# Altium PCB garmin-gps-module-eval-board.PcbDoc
Units mm, origin at the board's own origin, x right, y up, seen from the top; angles counter-clockwise.
Board outline 36 x 51 mm, 4 copper layers (Top Layer, GND, VCC, Bottom Layer), stack 0.603 mm thick; 42 components, 39 nets, 140 pads, 168 vias.
Unrouted connection lines stored in the file: 1.
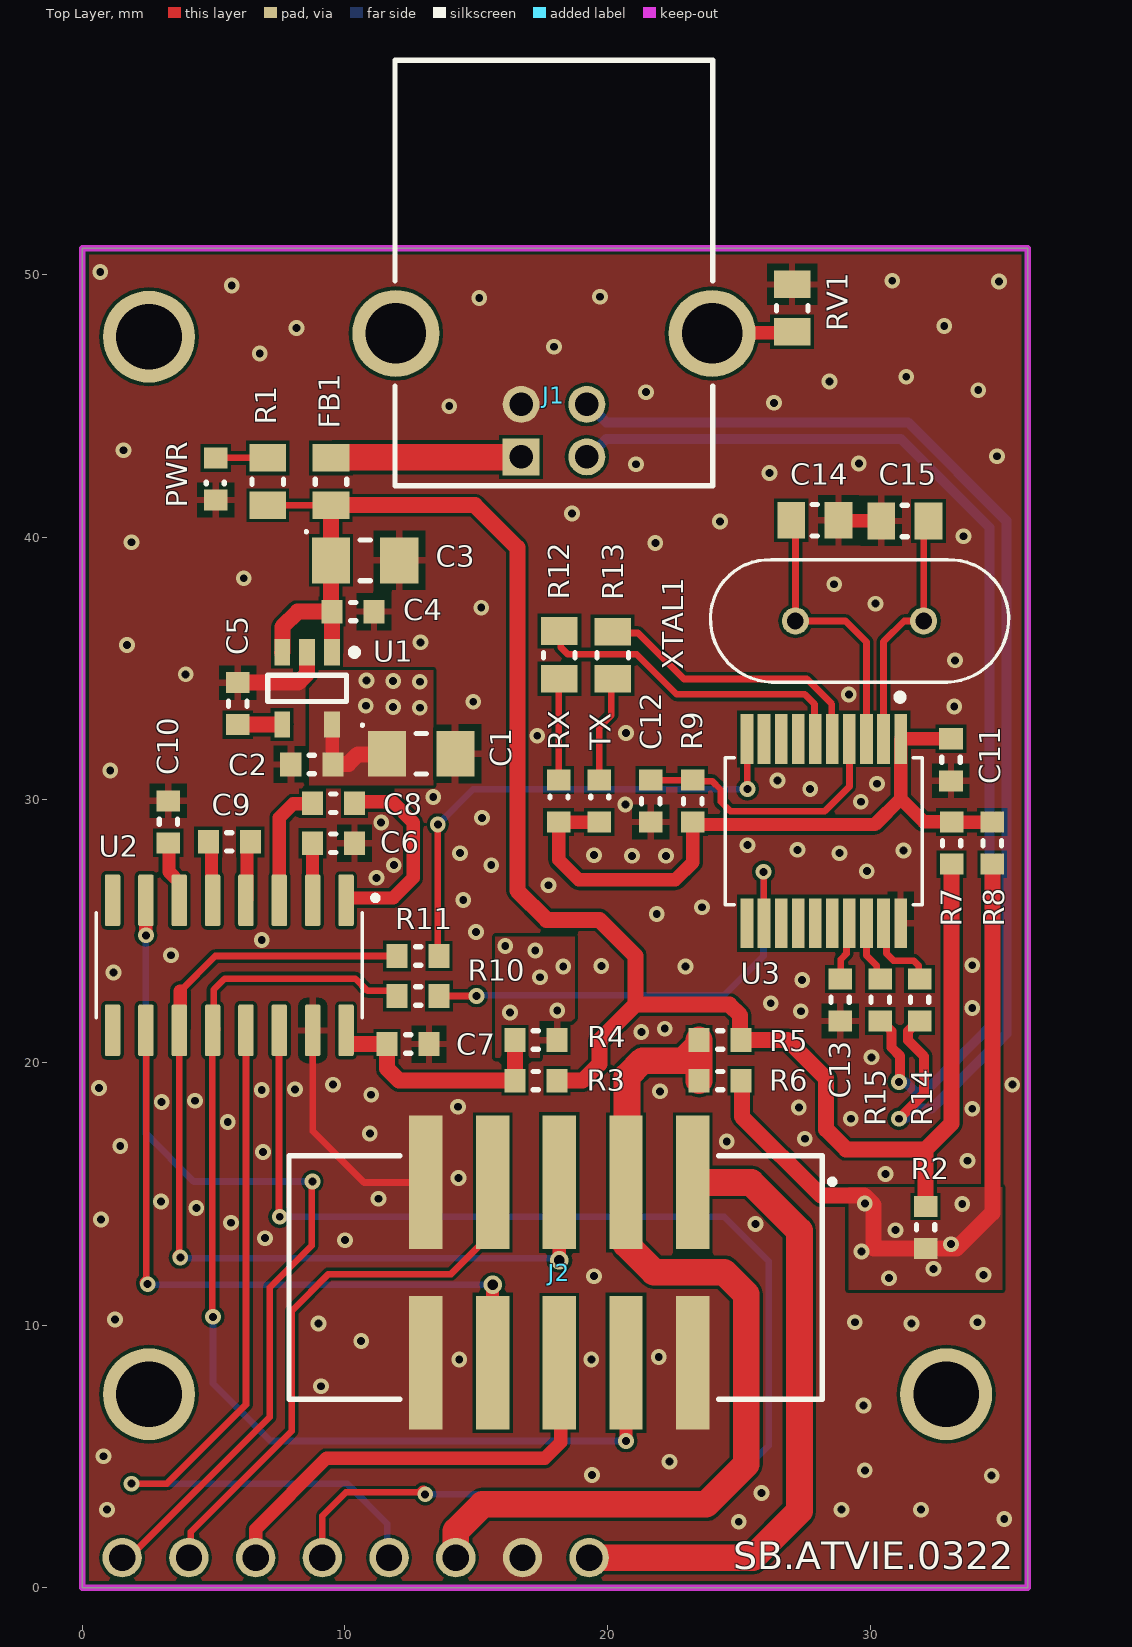
[diagram p0: Top Layer view]
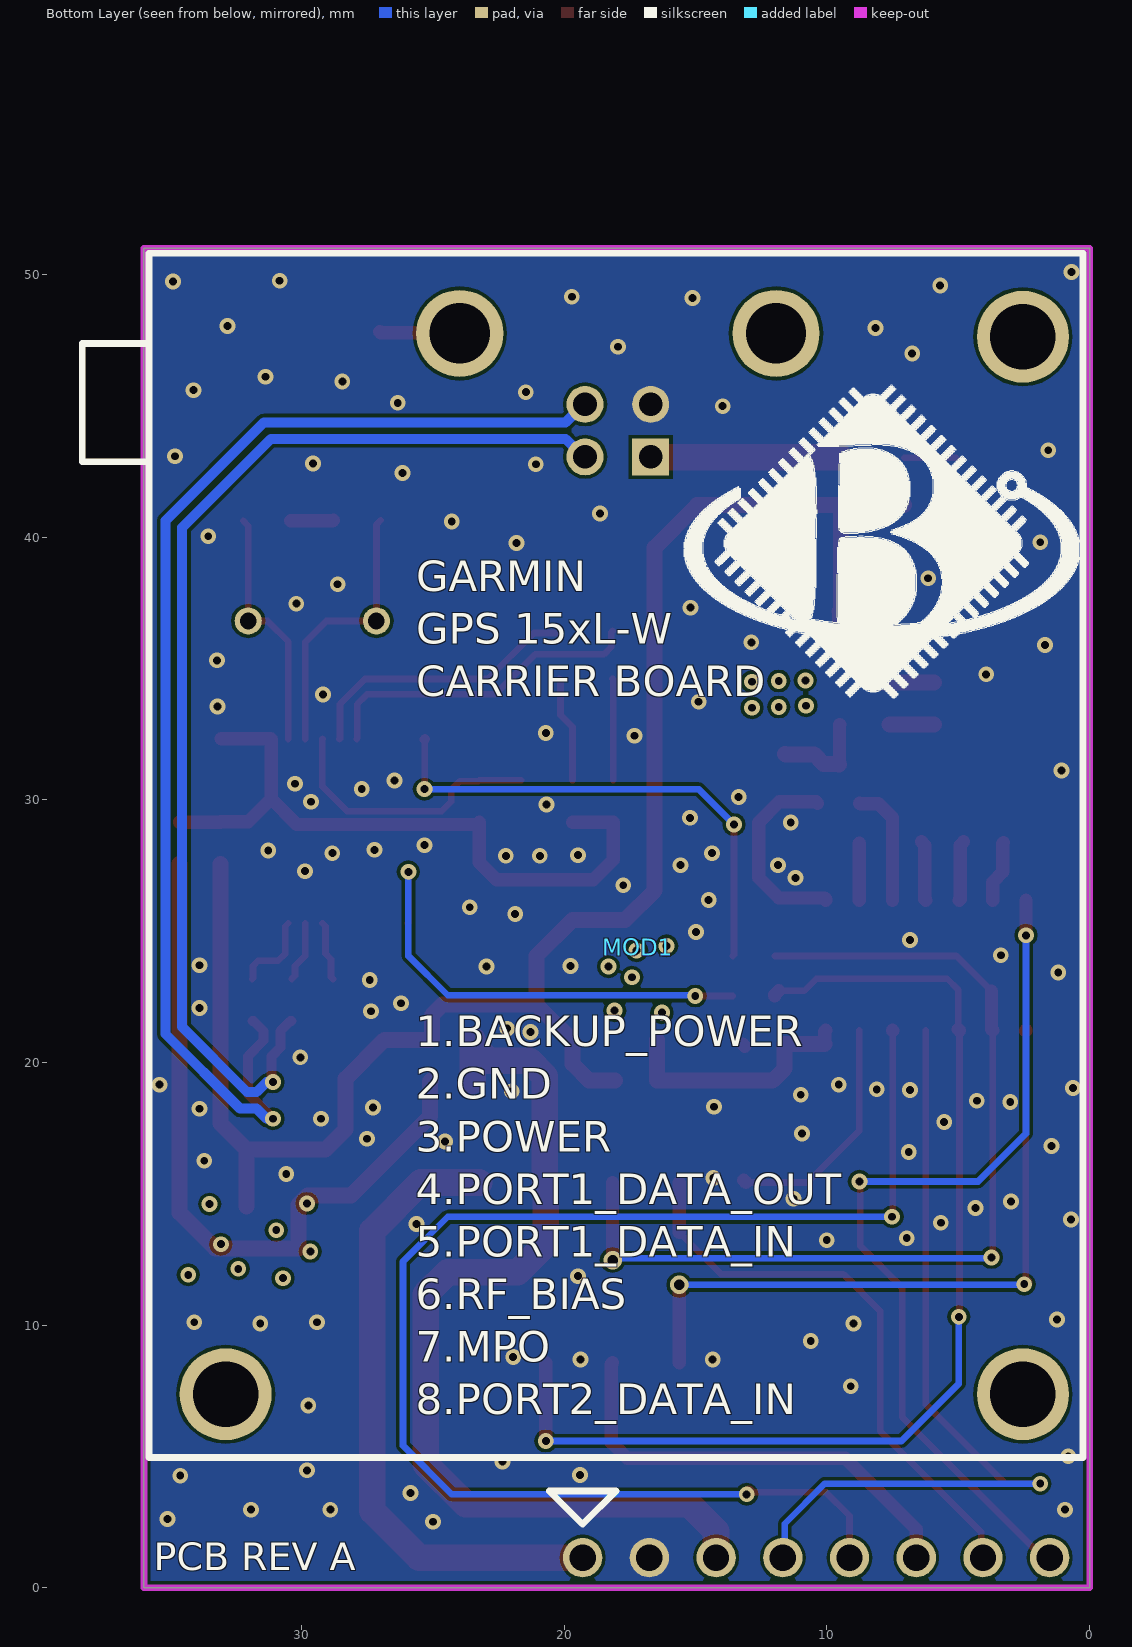
[diagram p1: Bottom Layer view, seen from below]
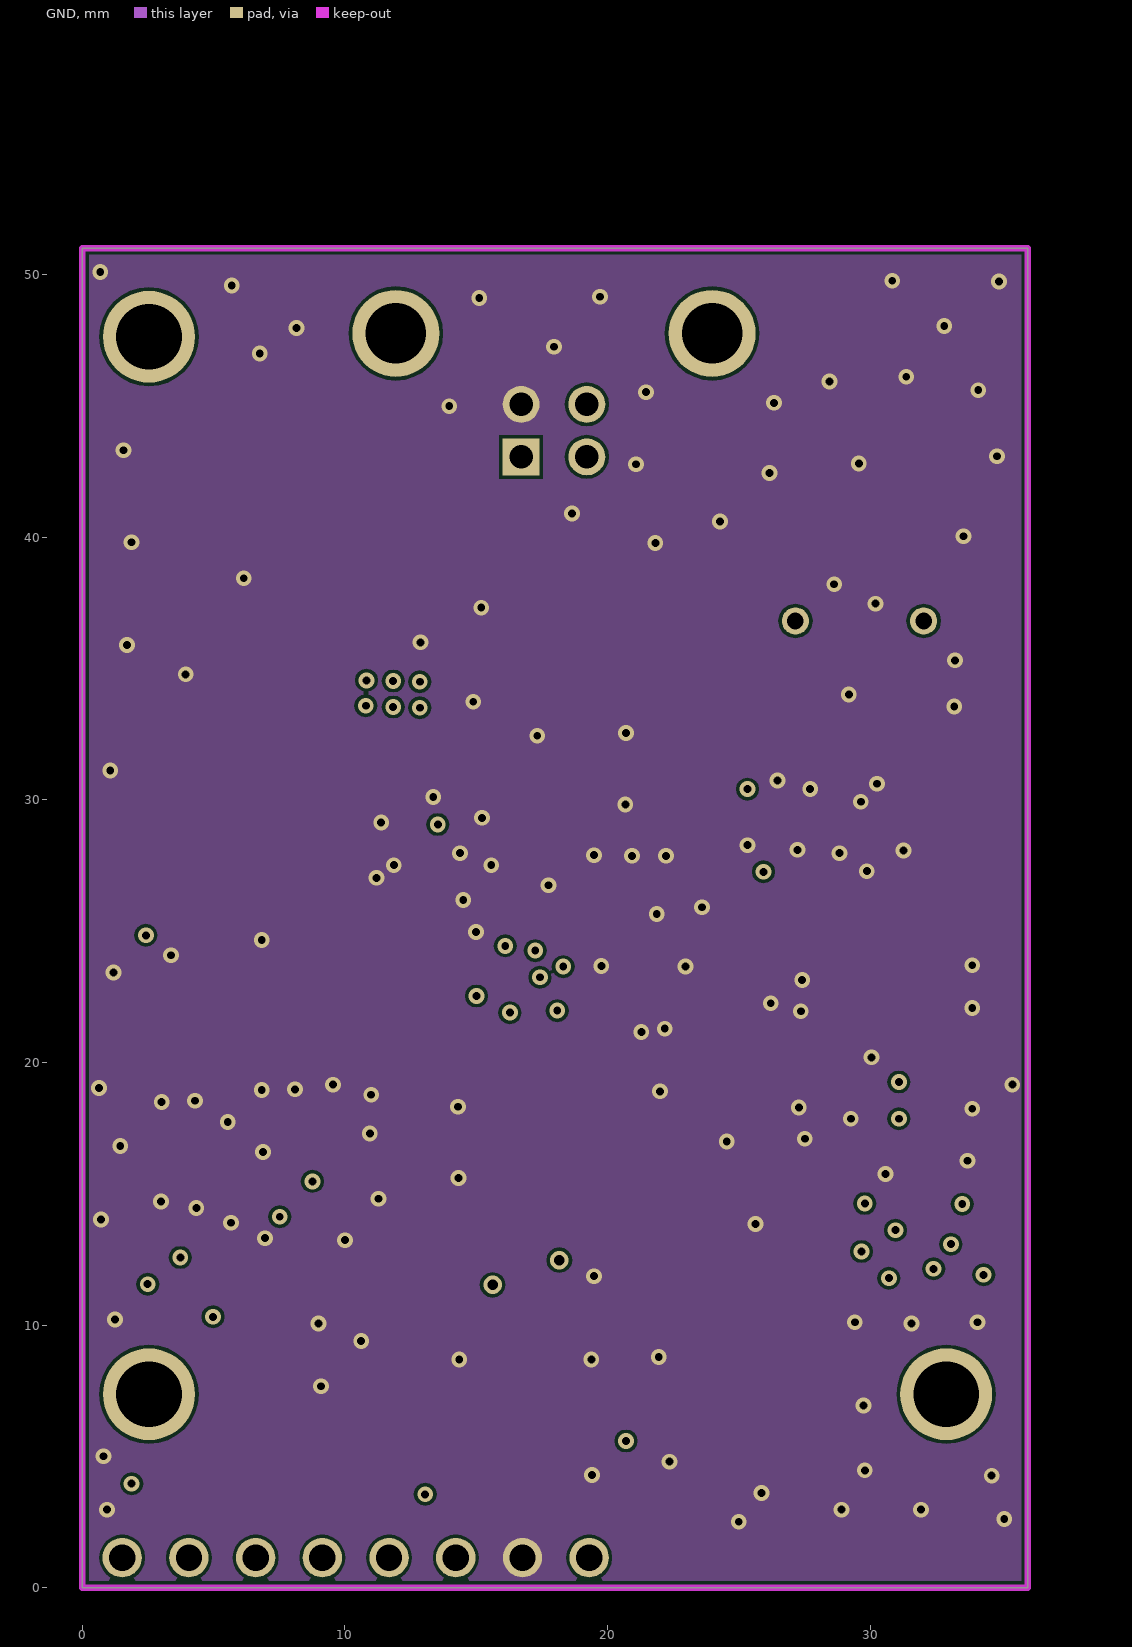
[diagram p2: GND]
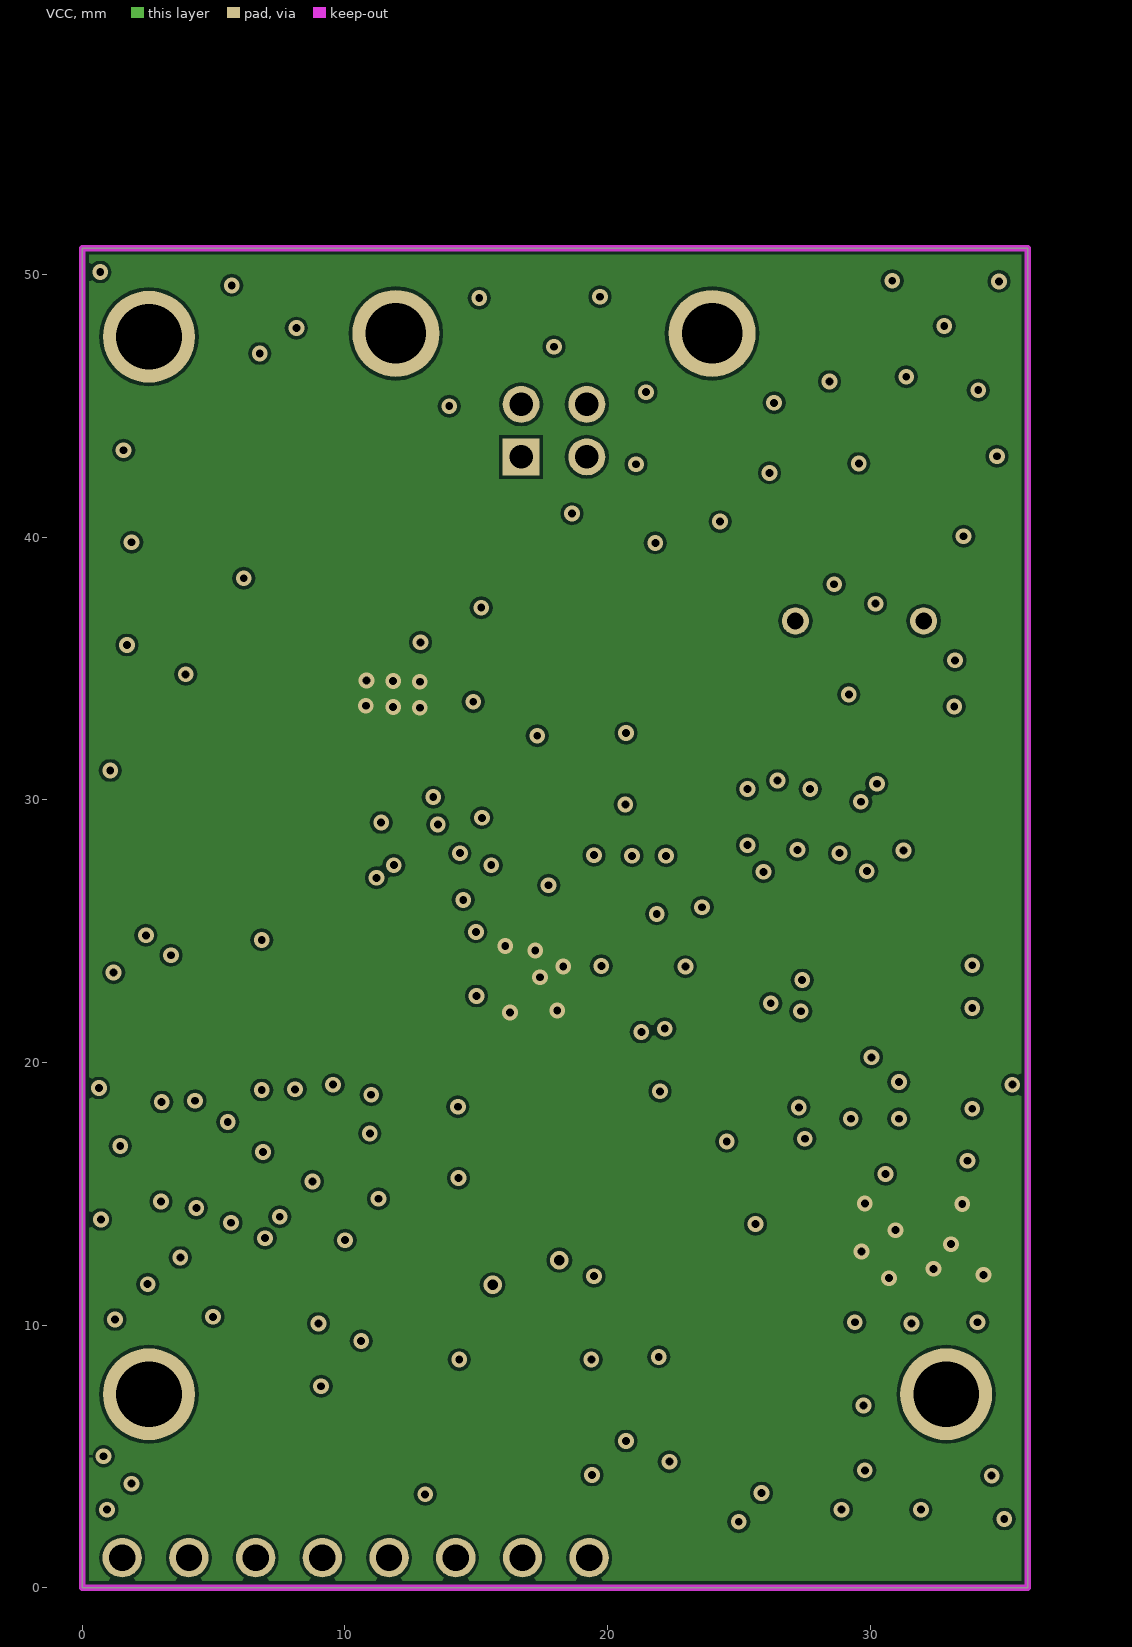
[diagram p3: VCC]

## Layer stack, top to bottom
Top Solder: solder mask 0.0102, Solder Resist, Dk 3.5
Top Layer: signal copper 0.0356
Dielectric 2: prepreg 0.0711, PP-006, Dk 4.1
GND: signal copper 0.035
Dielectric 1: dielectric 0.32, FR-4, Dk 4.8
VCC: signal copper 0.035
Dielectric 3: prepreg 0.0711, PP-006, Dk 4.1
Bottom Layer: signal copper 0.0356
Bottom Solder: solder mask 0.0102, Solder Resist, Dk 3.5

## Board outline
0,0 0,51 36,51 36,0

## Design rules (kind name [scope] priority, off if disabled: settings)
Clearance [All] p1: gap=0.127 ignorepadtopadclearanceinfootprint=FALSE except(0: Arc-Hole Track-Hole SMDPad-Hole THPad-Hole Via-Hole Fill-Hole Poly-Hole Region-Hole Text-Hole)
DiffPairsRouting [All] p1: maxlimit=0.254 minlimit=0.254 mostfreqgap=0.254 toplayer_minwidth=0.381 toplayer_maxwidth=0.381 toplayer_prefwidth=0.381 midlayer1_minwidth=0.381 midlayer1_maxwidth=0.381 midlayer1_prefwidth=0.381 midlayer2_minwidth=0.381 midlayer2_maxwidth=0.381 midlayer2_prefwidth=0.381 bottomlayer_minwidth=0.381 bottomlayer_maxwidth=0.381 bottomlayer_prefwidth=0.381 maxuncoupledlength=12.7
HoleSize [All] p1: absolutevalues=TRUE maxlimit=6.3 minlimit=0.3 maxpercent=80.000 minpercent=20.000
MinimumSolderMaskSliver [All] p1: minsoldermaskwidth=0.001
PolygonConnect [All] p1: connectstyle=Relief reliefconductorwidth=0.254 reliefentries=4 polygonreliefangle="90 Angle" airgapwidth=0.254
RoutingVias [All] p1: holewidth=0.3 width=0.4 viastyle="Through Hole" minholewidth=0.3 minwidth=0.4 maxholewidth=6.3 maxwidth=7
SilkToSilkClearance [All] p1: silktosilkclearance=0.127
SilkToSolderMaskClearance [IsPad] p1: minsilkscreentomaskgap=0 clearancetoexposedcopper=TRUE
SolderMaskExpansion [All] p1: expansion=0.102
Width [All] p1: maxlimit=20.32 minlimit=0.203 preferedwidth=0.254 midlayer1_minwidth=0.254 midlayer1_maxwidth=0.254 midlayer2_minwidth=0.254 midlayer2_maxwidth=0.254 minimp=50.000000 maximp=50.000000 favimp=50.000000
25 further rules are at their usual default settings.

## Classes and differential pairs
differential pair USB: +USB_P -USB_N

## Components (designator, comment, footprint, x,y, rotation, side; value= is the part's Value field where it differs from the comment)
C1 "10uF/16V" "SMD 1206 POLARIZED" 12.903,31.75 r0 top
C2 "100nF/16V" "SMD 0603 GENERIC" 8.738,31.344 r0 top
C3 "10uF/16V" "SMD 1206 POLARIZED" 10.77,39.116 r0 top
C4 "100nF/16V" "SMD 0603 GENERIC" 10.312,37.16 r180 top
C5 "10nF/16V" "SMD 0603 GENERIC" 5.918,33.655 r270 top
C6 "100nF/16V" "SMD 0603 GENERIC" 9.56,28.343 r0 top
C7 "100nF/16V" "SMD 0603 GENERIC" 12.405,20.698 r180 top
C8 "100nF/16V" "SMD 0603 GENERIC" 9.56,29.867 r180 top
C9 "100nF/16V" "SMD 0603 GENERIC" 5.598,28.394 r0 top
C10 "100nF/16V" "SMD 0603 GENERIC" 3.277,29.159 r270 top
C11 "100nF/16V" "SMD 0603 GENERIC" 33.071,31.521 r90 top
C12 "100nF/16V" "SMD 0603 GENERIC" 21.641,29.947 r90 top
C13 "100nF/16V" "SMD 0603 GENERIC" 28.854,22.377 r270 top
C14 "22pF/50V" "SMD 0805 GENERIC"#1 27.889,40.64 r180 top
C15 "22pF/50V" "SMD 0805 GENERIC"#1 31.318,40.615 r180 top
FB1 "11R 100 MHz 1.5A" "SMD 0805 GENERIC"#1 9.474,42.113 r90 top
J1 "CON THT USB 2.0 B RA" "THT CON USB 2.0 RA" 17.958,47.371 r180 top locked
J2 "CON SMD 10-PIN 2-ROW 2.54 WIDE" "SMD HEADER 2x5 2.54 WIDE" 15.621,12 r180 top locked
MOD1 "MOD GPS GARMIN 15XL" "THT MOD GPS GARMIN 15XH/15XL" 35.81,4.956 r180 bottom locked
PWR "1N4007" "SMD 0603 LED" 5.08,42.215 r270 top (schematic designator D1)
R1 "2K2" "SMD 0805 GENERIC"#1 7.061,42.113 r270 top
R2 "0R" "SMD 0603 GENERIC" 32.106,13.716 r90 top
R3 "0R" "SMD 0603 GENERIC" 17.272,19.304 r0 top
R4 "0R" "SMD 0603 GENERIC" 17.272,20.853 r0 top
R5 "0R" "SMD 0603 GENERIC" 24.282,20.853 r0 top
R6 "0R" "SMD 0603 GENERIC" 24.282,19.304 r0 top
R7 "0R" "SMD 0603 GENERIC" 33.096,28.346 r270 top
R8 "0R" "SMD 0603 GENERIC" 34.646,28.346 r270 top
R9 "10K" "SMD 0603 GENERIC" 23.241,29.947 r270 top
R10 "0R" "SMD 0603 GENERIC" 12.786,22.527 r180 top
R11 "0R" "SMD 0603 GENERIC" 12.786,24.051 r180 top
R12 "2K2" "SMD 0805 GENERIC"#2 18.161,35.509 r270 top
R13 "2K2" "SMD 0805 GENERIC"#3 20.193,35.509 r270 top
R14 "22R" "SMD 0603 GENERIC" 31.877,22.377 r90 top
R15 "22R" "SMD 0603 GENERIC" 30.378,22.377 r90 top
RV1 "18VDC 180pF" "SMD 0805 GENERIC"#1 27.026,48.717 r270 top
RX "1N4007" "SMD 0603 LED" 18.136,29.947 r90 top (schematic designator D2)
TX "1N4007" "SMD 0603 LED" 19.685,29.947 r90 top (schematic designator D3)
U1 "TPS79333DBVR" SOT23-5 8.56,34.239 r270 top
U2 "COM TRN RS232 MAX3232ESE" "SMD SOIC-16" 5.725,23.568 r270 top
U3 "MCP2200-I/SS" "SMD SSOP-20" 28.346,28.88 r270 top
XTAL1 "12.0 MHz" "THT XTAL HC49" 29.591,36.805 r180 top

## Footprints (in the part's own frame and the unit in brackets; to place one, negate y for a bottom-side part, rotate by r counter-clockwise, add the part's x,y. Pads: shape width x height; smd on the part's side, far side on the other; paste and mask are expansions set on the pad)
"SMD 0603 GENERIC" [mm]
  rect 0.8x0.9 smd: 1(-0.8,0) 2(0.8,0)
  silkscreen extent -0.1,-0.35 0.1,0.35, body extent -0.85,-0.45 0.85,0.45, height 0.55
"SMD 0603 LED" [mm]
  rect 0.8x0.9 smd: A(-0.8,0) K(0.8,0)
  silkscreen extent 0.13,-0.36 0.19,0.33, body extent -0.85,-0.45 0.85,0.45, height 0.55
"SMD 0805 GENERIC"#1 [mm]
  rect 1.05x1.4 smd: 1(-0.9,0) 2(0.9,0)
  silkscreen extent -0.1,-0.6 0.1,0.6, body extent -1.05,-0.7 1.05,0.7, height 0.6
"SMD 0805 GENERIC"#2 [mm]
  rect 1.05x1.4 smd: 1(-0.914,0) 2(0.9,0)
  silkscreen extent -0.1,-0.6 0.1,0.6, body extent -1.05,-0.7 1.05,0.7, height 0.6
"SMD 0805 GENERIC"#3 [mm]
  rect 1.05x1.4 smd: 1(-0.889,0) 2(0.9,0)
  silkscreen extent -0.1,-0.6 0.1,0.6, body extent -1.05,-0.7 1.05,0.7, height 0.6
"SMD 1206 POLARIZED" [mm] "BAUFORM A"
  rect 1.45x1.75 smd: 1(-1.3,0) 2(1.3,0)
  silkscreen extent -2.29,-0.77 0.2,1.14, body extent -1.65,-0.85 1.65,0.85, height 1.6
"SMD HEADER 2x5 2.54 WIDE" [mil]
  rect 50x200 smd: 1(-300,-135) 2(-300,135) 3(-200,-135) 4(-200,135) 5(-100,-135) 6(-100,135) 7(0,-135) 8(0,135) 9(100,-135) 10(100,135)
  silkscreen extent -513,-175 305,190, body extent -500,-220 300,220, height 450
"SMD SOIC-16" [mm]
  rrect25% 1.97x0.59 smd: 1(-2.602,4.318) 2(-2.602,3.048) 3(-2.602,1.778) 4(-2.602,0.508) 5(-2.602,-0.762) 6(-2.602,-2.032) 7(-2.602,-3.302) 8(-2.602,-4.572) 9(2.348,-4.572) 10(2.348,-3.302) 11(2.348,-2.032) 12(2.348,-0.762) 13(2.348,0.508) 14(2.348,1.778) 15(2.348,3.048) 16(2.348,4.318)
  silkscreen extent -2.79,-5.19 1.87,5.54, body extent -3.12,-5.08 2.87,4.83, height 1.75
"SMD SSOP-20" [mm]
  rect 1.9x0.48 smd: 1(-3.429,2.809) 2(-3.429,2.159) 3(-3.429,1.509) 4(-3.429,0.859) 5(-3.429,0.209) 6(-3.429,-0.441) 7(-3.429,-1.091) 8(-3.429,-1.741) 9(-3.429,-2.391) 10(-3.429,-3.041) 11(3.581,-3.041) 12(3.581,-2.391) 13(3.581,-1.741) 14(3.581,-1.091) 15(3.581,-0.441) 16(3.581,0.209) 17(3.581,0.859) 18(3.581,1.509) 19(3.581,2.159) 20(3.581,2.809)
  silkscreen extent -5.12,-3.87 2.88,3.63, body extent -3.85,-3.7 3.95,3.5, height 2
SOT23-5 [mm]
  rect 1x0.6 smd: 1(-1.375,0.95) 2(-1.375,0) 3(-1.375,-0.95) 4(1.375,-0.95) 5(1.375,0.95)
  silkscreen extent -1.5,-1.5 0.5,1.93, body extent -0.88,-1.5 0.87,1.5, height 1.45
"THT CON USB 2.0 RA" [mm]
  rect 1.408x1.408 hole 0.9: 1(1.25,4.319)
  round 1.408 hole 0.9: 2(-1.25,4.319) 3(-1.25,2.319) 4(1.25,2.319)
  round 3.316 hole 2.3: S1(-6.02,-0.381) S2(6.02,-0.381)
  silkscreen extent -6.05,-10.78 6.05,5.42, body extent -7.25,-10.89 7.25,5.61, height 10.7
"THT MOD GPS GARMIN 15XH/15XL" [mm]
  round 3.5 hole 2.5: 0(2.92,2.41) 0(33.27,2.41) 0(33.27,42.67)
  round 1.5 hole 1: 1(16.51,-3.81) 2(19.05,-3.81) 3(21.59,-3.81) 4(24.13,-3.81) 5(26.67,-3.81) 6(29.21,-3.81) 7(31.75,-3.81) 8(34.29,-3.81)
  silkscreen extent -2.54,-2.54 35.56,45.85
"THT XTAL HC49" [mm]
  round 1.03 hole 0.63: 1(-2.44,0) 2(2.44,0)
  silkscreen extent -5.68,-2.33 5.68,2.33, body extent -5.68,-2.54 5.68,2.46, height 2.1

## Part data
C1 C3: library part "CAP SMD TAN 10uF 16V 10% 1206"
C2 C4 C6 C7 C8 C9 C10 C11 C12 C13: library part "CAP SMD CER 100nF 16V 10% X7R 0603"
C5: library part "CAP SMD CER 10nF 16V 10% X7R 0603"
C14 C15: library part "CAP SMD CER 22pF 50V 5% C0G 0805"
FB1: library part "FBD SMD 11R 100MHz 1.5A 0805"
J1: "USB-B (USB TYPE-B) USB 2.0 Receptacle Connector 4 Position Through Hole, Right Angle"
J2: "HTST-105-01-SM-DV-P"
PWR RX TX: library part "SEM GEN LED 0603"
R1 R12 R13: library part "RES SMD 2K2 1% 0805"
R2 R3 R4 R5 R6 R7 R8 R10 R11: library part "RES SMD 0R 0603"
R9: library part "RES SMD 10K 1% 0603"
R14 R15: library part "RES SMD 22R 1% 0603"
RV1: library part "VAR SMD 18VDC 180pF 0805"
U1: library part "PWR TPS79333DBVR"
U3: library part "COM TRN UART MCP2200-I/SS"
XTAL1: library part "XTAL THT 12.0 MHz HC49"

## Via types
v1: diameter 0.6, hole 0.3, Top Layer to Bottom Layer, tented both sides, 166 vias
v2: diameter 0.7, hole 0.4, Top Layer to Bottom Layer, tented both sides, 2 vias

## Nets (pads, with @x,y where several pads share a name; then routed paths per layer and width w, separated by ;. In a path a pad name is that pad's centre, name@x,y a point inside that pad or via, vN(x,y) a via of type N, cw(c..) or ccw(c..) an arc to the next point about the centre after c; other vN are vias at no path point)
+3V3: C1.1 C2.2 R2.1 R4.2 R6.2 R8.2 U1.5 | length 31.6
  Top Layer w0.508: U1.5 9.524,32.85 9.524,31.357 C2.2
  Top Layer w0.61: C2.2 9.563,31.369 10.135,31.369 10.49,31.725 11.578,31.725 C1.1 ; R6.2 25.113,19.273 25.113,17.94 28.118,14.935 29.767,14.935 30.124,14.578 30.124,12.929 30.137,12.916 R2.1 33.287,12.916 34.646,14.275 R8.2
  other v1: 30.709,11.786 34.315,11.913 32.41,12.141 29.667,12.802 33.071,13.081 30.963,13.614 33.503,14.605 29.794,14.63 16.281,21.895 18.085,21.971 17.424,23.241 18.313,23.647 17.247,24.257 16.104,24.435 12.852,33.503 11.836,33.528 10.795,33.579 12.852,34.493 11.836,34.519 10.82,34.544
+5: C3.1 C4.2 FB1.1 R1.2 R2.2 R3.2 R5.2 R7.2 U1.1 U1.3 | length 72.5
  Top Layer w0.254: R1.2 9.449,41.213 FB1.1@9.461,41.2
  Top Layer w0.61: R1.2 R1.2@7.074,41.226 ; U1.3 7.615,35.619 7.615,36.577 8.198,37.16 C4.2 ; FB1.1@9.461,41.2 9.472,41.19 9.472,39.118 C3.1 9.47,37.203 C4.2 ; FB1.1 14.946,41.213 16.561,39.599 16.561,26.543 17.678,25.425 19.685,25.425 21.057,24.054 21.057,22.2 ; U1.1@9.505,35.609 U1.1 9.511,35.616 9.511,37.159 C4.2 ; R3.2 19.05,19.304 19.685,19.939 19.685,20.828 21.057,22.2 ; R2.2 32.106,16.688 ; R7.2 33.096,17.678 32.106,16.688 ; 21.057,22.2 24.638,22.2 25.044,21.793 25.044,20.891 R5.2 26.848,20.853 28.321,19.38 28.321,17.45 29.083,16.688 32.106,16.688
GND: C1.2 C2.1 C3.2 C4.1 C5.1 C6.2 C7.1 C10.1 C11.1 C12.1 C13.2 C14.1 C15.2 J1.4 J2.2 J2.9 J2.10 MOD1.2 PWR.K RV1.1 U1.2 U2.15 U3.20 | length 14.5
  Top Layer w0.254: U2.15 8.773,17.389 10.733,15.429 J2.9
  Top Layer w0.508: U1.2@8.534,35.589 U1.2 ; J2.9 J2.9@13.164,15.512 ; C7.1@13.123,20.615 C7.1 ; C14.1 28.802,40.627 30.406,40.627 C15.2
  Top Layer w0.61: C5.1 8.217,34.455 8.56,34.798 U1.2
  other v1: 24.994,2.515 35.103,2.616 0.94,2.972 28.905,2.972 31.928,2.972 25.857,3.607 34.62,4.267 19.406,4.293 29.794,4.47 22.352,4.801 0.813,5.004 29.743,6.934 9.093,7.671 14.351,8.687 19.38,8.687 21.946,8.788 10.617,9.398 8.992,10.058 31.572,10.058 29.413,10.109 34.087,10.109 1.245,10.211 19.482,11.862 10.008,13.233 6.96,13.31 25.629,13.843 5.664,13.894 0.711,14.021 4.343,14.453 2.997,14.707 11.278,14.808 14.326,15.596 30.582,15.748 33.706,16.256 6.883,16.586 1.448,16.815 24.536,16.993 27.508,17.094 10.947,17.297 5.537,17.729 29.261,17.856 33.884,18.237 27.28,18.288 14.3,18.313 3.023,18.491 4.293,18.542 10.998,18.771 21.996,18.898 6.833,18.948 8.103,18.974 0.635,19.025 9.55,19.152 35.408,19.152 30.048,20.193 21.285,21.158 22.174,21.285 27.356,21.946 33.884,22.073 26.213,22.25 27.407,23.139 1.194,23.419 22.962,23.647 19.761,23.673 33.884,23.698 3.378,24.079 6.833,24.663 14.986,24.968 21.869,25.654 23.597,25.908 14.503,26.187 17.755,26.746 11.201,27.026 29.87,27.28 11.862,27.508 15.57,27.508 20.93,27.864 22.225,27.864 19.482,27.889 14.376,27.965 28.829,27.965 31.267,28.067 27.229,28.092 25.324,28.27 11.379,29.134 15.215,29.312 20.676,29.82 29.642,29.921 13.36,30.099 27.711,30.404 30.251,30.607 26.467,30.734 1.067,31.115 17.323,32.436 20.701,32.537 33.198,33.553 14.884,33.731 29.185,34.011 3.937,34.773 33.223,35.306 1.702,35.89 12.878,35.992 15.189,37.313 30.201,37.465 28.626,38.202 6.147,38.43 21.819,39.776 1.88,39.802 33.553,40.03 24.282,40.589 18.644,40.894 26.162,42.443 21.082,42.774 29.566,42.799 34.823,43.078 1.575,43.307 13.97,44.983 26.34,45.11 21.463,45.517 34.112,45.593 28.448,45.923 31.369,46.101 6.756,46.99 17.958,47.244 8.153,47.955 32.817,48.031 15.113,49.098 19.71,49.149 5.69,49.581 34.9,49.733 30.836,49.759 0.686,50.089
GPS_BACKUP_POWER: J2.1 MOD1.1 | length 24.2
  Top Layer w1.016: MOD1.1 25.53,1.146 27.305,2.921 27.305,13.589 25.465,15.429 J2.1
GPS_MPO: J2.7 MOD1.7 | length 21.8
  Top Layer w0.254: MOD1.7@4.131,1.217 4.131,2.125 7.976,5.969 7.976,10.541 9.373,11.938 14.035,11.938 J2.7@15.621,13.524
  Top Layer w0.508: MOD1.7 MOD1.7@4.131,1.217 ; J2.7@15.621,13.524 J2.7
GPS_PORT1_DATA_IN: MOD1.5 U2.14 | length 53.2
  Top Layer w0.254: v1@7.49,14.151 U2.14@7.49,21.207 ; MOD1.5 9.14,2.739 10.033,3.632 v1@12.979,3.632
  Top Layer w0.508: v1@7.49,14.151 v1(7.518,14.122) v1@7.531,14.135 ; U2.14@7.49,21.207 U2.14 ; v1@12.979,3.632 v1(13.056,3.556)
  Bottom Layer w0.254: v1(7.518,14.122) 24.435,14.122 26.137,12.421 26.137,5.41 24.282,3.556 v1(13.056,3.556)
GPS_PORT1_DATA_OUT: MOD1.4 U2.13 | length 31.5
  Top Layer w0.254: v1(1.88,3.962) 3.226,3.962 6.233,6.969 U2.13
  Bottom Layer w0.254: v1(1.88,3.962) 10.084,3.962 11.608,2.438 MOD1.4@11.608,1.218
  Bottom Layer w0.508: MOD1.4@11.608,1.218 MOD1.4
GPS_PORT2_DATA_IN: MOD1.8 U2.7 | length 33.5
  Top Layer w0.254: MOD1.8@1.781,1.146 7.137,6.502 7.137,11.43 8.738,13.03 v1@8.738,15.443
  Top Layer w0.508: MOD1.8 MOD1.8@1.781,1.146 ; v1(2.423,24.838) U2.7 ; v1@8.738,15.443 v1(8.763,15.469)
  Bottom Layer w0.254: v1(2.423,24.838) 2.423,17.288 4.242,15.469 v1(8.763,15.469)
GPS_POWER: J2.3 MOD1.3 R5.1 R6.1 | length 36.1
  Top Layer w1.016: MOD1.3 14.224,1.15 14.224,2.159 15.24,3.175 23.749,3.175 25.273,4.699 25.273,11.176 24.435,12.014 21.768,12.014 20.701,13.081 J2.3 20.738,15.466 20.738,19.471 21.333,20.066 22.887,20.066 R5.1@23.482,20.661 ; R6.1 R5.1@23.482,20.661 ; R5.1 R5.1@23.482,20.661
GPS_RF_BIAS: J2.6 MOD1.6 | length 17.1
  Top Layer w0.508: MOD1.6 6.6,2.231 9.296,4.928 17.602,4.928 18.212,5.537 18.212,8.52 J2.6
MCP2200_OSC1: C15.1 U3.2 XTAL1.1 | length 9.4
  Top Layer w0.254: U3.2 30.505,36.017 31.293,36.805 XTAL1.1 32.031,40.427 C15.1
MCP2200_OSC2: C14.2 U3.3 XTAL1.2 | length 10.7
  Top Layer w0.254: C14.2 27.151,40.478 XTAL1.2 29.058,36.805 29.855,36.007 U3.3 ; XTAL1.2@27.176,36.449 XTAL1.2@27.202,36.474
NetC5_2: C5.2 U1.4 | length 1.7
  Top Layer w0.61: C5.2 5.923,32.86 7.605,32.86 U1.4
NetC6_1: C6.1 U2.2 | length 2.2
  Top Layer w0.508: C6.1 8.767,28.337 8.767,26.176 U2.2
NetC7_2: C7.2 R3.1 R4.1 U2.16 | length 9.6
  Top Layer w0.508: U2.16 10.084,21.179 U2.16@10.084,20.698 ; C7.2 C7.2@11.608,20.695
  Top Layer w0.61: U2.16@10.084,20.698 C7.2 ; C7.2@11.608,20.695 11.608,19.761 12.065,19.304 R3.1 R4.1
NetC8_1: C8.1 U2.1 | length 7.6
  Top Layer w0.508: U2.1 10.043,26.22 10.084,26.261 11.833,26.261 12.598,27.026 12.598,29.134 11.814,29.918 10.411,29.918 C8.1
NetC8_2: C8.2 U2.3 | length 4.6
  Top Layer w0.508: U2.3 7.503,29.309 8.036,29.842 8.735,29.842 C8.2
NetC9_1: C9.1 U2.5 | length 2.3
  Top Layer w0.508: C9.1 4.922,28.27 4.922,26.211 U2.5
NetC9_2: C9.2 U2.4 | length 2.3
  Top Layer w0.508: U2.4 6.274,26.211 6.274,28.27 C9.2
NetC10_2: C10.2 U2.6 | length 2.4
  Top Layer w0.508: C10.2 3.302,28.334 3.302,27.251 3.693,26.86 U2.6
NetC11_2: C11.2 R7.1 R8.1 R9.2 RX.A TX.A U3.1 | length 26.6
  Top Layer w0.508: TX.A RX.A 18.136,27.711 18.898,26.949 22.581,26.949 23.241,27.61 R9.2 23.33,29.058 30.18,29.058 31.155,30.033 ; C11.2 31.168,32.321 U3.1 31.155,30.033 ; R8.1 R7.1 33.083,29.159 32.029,29.159 31.155,30.033
NetC12_2: C12.2 R9.1 U3.4 | length 10.5
  Top Layer w0.254: C12.2 R9.1 23.279,30.709 23.978,30.709 24.308,30.378 24.308,29.921 24.663,29.566 28.27,29.566 29.21,30.505 29.21,32.304 U3.4
NetC13_1: C13.1 U3.17 | length 2.3
  Top Layer w0.254: C13.1@28.804,23.177 28.88,23.254 28.88,23.927 29.092,24.139 29.092,25.186 U3.17
NetD1_A: PWR.A R1.1 | length 2
  Top Layer w0.254: PWR.A 7.06,43.015 R1.1
NetD2_K: R12.2 RX.K | length 3.9
  Top Layer w0.254: RX.K 18.136,34.584 R12.2
NetD3_K: R13.2 TX.K | length 4.1
  Top Layer w0.254: TX.K 19.685,32.766 20.142,33.223 20.142,34.558 R13.2
NetFB1_2: FB1.2 J1.1 | length 7.2
  Top Layer w0.508: FB1.2@9.525,43.042 FB1.2@9.53,43.047
  Top Layer w1.016: FB1.2@9.525,43.042 16.698,43.042 J1.1
NetJ1_S1: J1.S1 J1.S2 RV1.2 | length 3.1
  Top Layer w0.508: J1.S1 24.01,47.785 26.993,47.785 RV1.2
NetR10_1: R10.1 U3.12 | length 18.1
  Top Layer w0.254: R10.1 13.589,22.53 v1(15.011,22.53) ; v1(25.933,27.254) 25.944,27.243 25.944,25.31 U3.12
  Bottom Layer w0.254: v1(15.011,22.53) 15.037,22.555 24.435,22.555 25.933,24.054 v1(25.933,27.254)
NetR11_1: R11.1 U3.10 | length 19.4
  Top Layer w0.254: v1(13.538,29.058) 13.538,24.099 R11.1 ; v1@25.315,30.413 U3.10@25.315,32.3
  Top Layer w0.381: U3.10 U3.10@25.315,32.3 ; v1@25.315,30.413 v1(25.324,30.404)
  Bottom Layer w0.254: v1@13.437,29.159 v1(13.538,29.058) 14.884,30.404 v1(25.324,30.404)
NetR12_1: R12.1 U3.6 | length 12.5
  Top Layer w0.254: R12.1 18.212,36.373 18.212,35.814 18.491,35.535 21.107,35.535 22.631,34.011 27.508,34.011 27.879,33.64 27.879,32.335 U3.6
NetR13_1: R13.1 U3.5 | length 10.8
  Top Layer w0.254: R13.1 20.244,36.347 21.158,36.347 22.911,34.595 27.584,34.595 28.539,33.64 28.539,32.325 U3.5
NetR14_2: R14.2 U3.19 | length 3.1
  Top Layer w0.254: U3.19 30.618,25.186 30.618,24.144 30.886,23.876 31.648,23.876 31.852,23.673 31.852,23.203 R14.2
NetR15_2: R15.2 U3.18 | length 2.3
  Top Layer w0.254: U3.18 29.855,24.069 30.251,23.673 30.251,23.304 R15.2
TTL_PORT1_DATA_IN: J2.5 R11.2 U2.11 | length 36.4
  Top Layer w0.254: v1@3.693,12.614 U2.11 ; 3.734,22.72 5.064,24.051 R11.2
  Top Layer w0.508: v1@3.693,12.614 v1(3.734,12.573) ; U2.11 3.734,21.261 3.734,22.72 ; v2(18.161,12.471) J2.5
  Bottom Layer w0.254: v1@3.759,12.548 v2@18.085,12.548
  Bottom Layer w0.508: v1(3.734,12.573) v1@3.759,12.548 ; v2@18.085,12.548 v2(18.161,12.471)
TTL_PORT1_DATA_OUT: J2.4 R10.2 U2.12 | length 42.1
  Top Layer w0.254: v1@4.95,10.341 U2.12@4.95,21.207 ; U2.12@5.004,21.261 5.004,22.771 5.42,23.187 10.398,23.187 10.863,22.723 R10.2@11.84,22.723
  Top Layer w0.508: v1@4.95,10.341 v1(4.978,10.312) v1@4.991,10.325 ; U2.12@4.95,21.207 U2.12 U2.12@5.004,21.261 ; R10.2@11.84,22.723 11.986,22.577 R10.2 ; v1(20.701,5.588) J2.4
  Bottom Layer w0.254: v1(4.978,10.312) 4.978,7.772 7.163,5.588 v1(20.701,5.588)
TTL_PORT2_DATA_IN: J2.8 U2.10 | length 25.8
  Top Layer w0.254: v1@2.435,11.611 U2.10@2.435,21.207
  Top Layer w0.508: U2.10 U2.10@2.435,21.207 ; v1@2.435,11.611 v1(2.489,11.557) ; J2.8 v2(15.621,11.532)
  Bottom Layer w0.254: v1@2.515,11.532 v2(15.621,11.532)
  Bottom Layer w0.508: v1(2.489,11.557) v1@2.515,11.532
USB_N: J1.2 R15.1 | length 43.4
  Top Layer w0.381: R15.1 30.428,21.577 30.81,21.196 30.81,20.566 31.14,20.237 31.14,19.303 v1(31.09,19.253)
  Bottom Layer w0.381: J1.2 19.262,43.052 19.944,43.734 31.17,43.734 34.544,40.361 34.544,21.343 32.073,18.872 31.711,18.872 31.33,19.253 v1(31.09,19.253)
USB_P: J1.3 R14.1 | length 47.3
  Top Layer w0.381: v1(31.09,17.856) 32.042,18.809 32.042,20.232 31.445,20.829 31.445,21.196 31.827,21.577 R14.1
  Bottom Layer w0.381: J1.3 19.262,45.052 19.944,44.369 31.433,44.369 35.179,40.624 35.179,21.08 32.336,18.237 31.711,18.237 31.33,17.856 v1(31.09,17.856)
pads on no net: MOD1.0 U2.8 U2.9 U3.7 U3.8 U3.9 U3.11 U3.13 U3.14 U3.15 U3.16

## Polygon pours and split planes (outlines as drawn)
GND on Top Layer "Top Layer-GND" (solid, remove dead copper, pour order 14): 0,51 36,51 36,0 0,0
+3V3 on Top Layer "Top Layer-+3V3" (solid, remove dead copper, pour order 12): 29.172,15.24 35.027,15.24 35.027,11.354 29.172,11.354
+3V3 on Top Layer "Top Layer-+3V3 1" (solid, remove dead copper, pour order 10): 18.745,20.168 18.745,24.79 15.723,24.79 15.723,20.193 15.697,20.168
+3V3 on Top Layer "Top Layer-+3V3 2" (solid, remove dead copper, pour order 8): 33.477,14.961
+3V3 on Top Layer "Top Layer-+3V3 3" (solid, remove dead copper, pour order 4): 8.636,34.925 8.636,30.556 13.36,30.556 13.36,34.925
GND on GND "GND-GND" (solid, remove dead copper, pour order 0): 0,51 36,51 36,0 0,0
+3V3 on VCC "VCC-+3V3" (solid, pour order 2): 0,51 36,51 36,0 0,0
GND on Bottom Layer "Bottom Layer-GND" (solid, remove dead copper, pour order 16): 0,51 36,51 36,0 0,0

## Keep-outs
Keep-Out Layer:
  the board outline again, w0.254

## Silkscreen, mask and mechanical layers (free items; w line width, h text height)
Top Overlay:
  text "SB.ATVIE.0322" at 24.79,0.356 h1.8
Bottom Overlay:
  drawing of 6448 lines, arcs and shapes, not listed
  text "GARMIN / GPS 15xL-W / CARRIER BOARD" at 25.629,33.553 h2
  text "PCB REV A" at 35.637,0.33 h1.8

## Text inside footprints (layer, text, board x,y; h text height)
MOD1: Bottom Overlay "1.BACKUP_POWER / 2.GND / 3.POWER / 4.PORT1_DATA_OUT / 5.PORT1_DATA_IN / 6.RF_BIAS / 7.MPO / 8.PORT2_DATA_IN" at 25.65,6.226 h2